# Altium PCB Routed BOARD 1.pcbdoc
Units mil, origin at the board's own origin, x right, y up, seen from the top; angles counter-clockwise.
Board outline 5016 x 3650 mil, 2 copper layers (TopLayer, BottomLayer); 37 components, 98 nets, 554 pads, 116 vias.
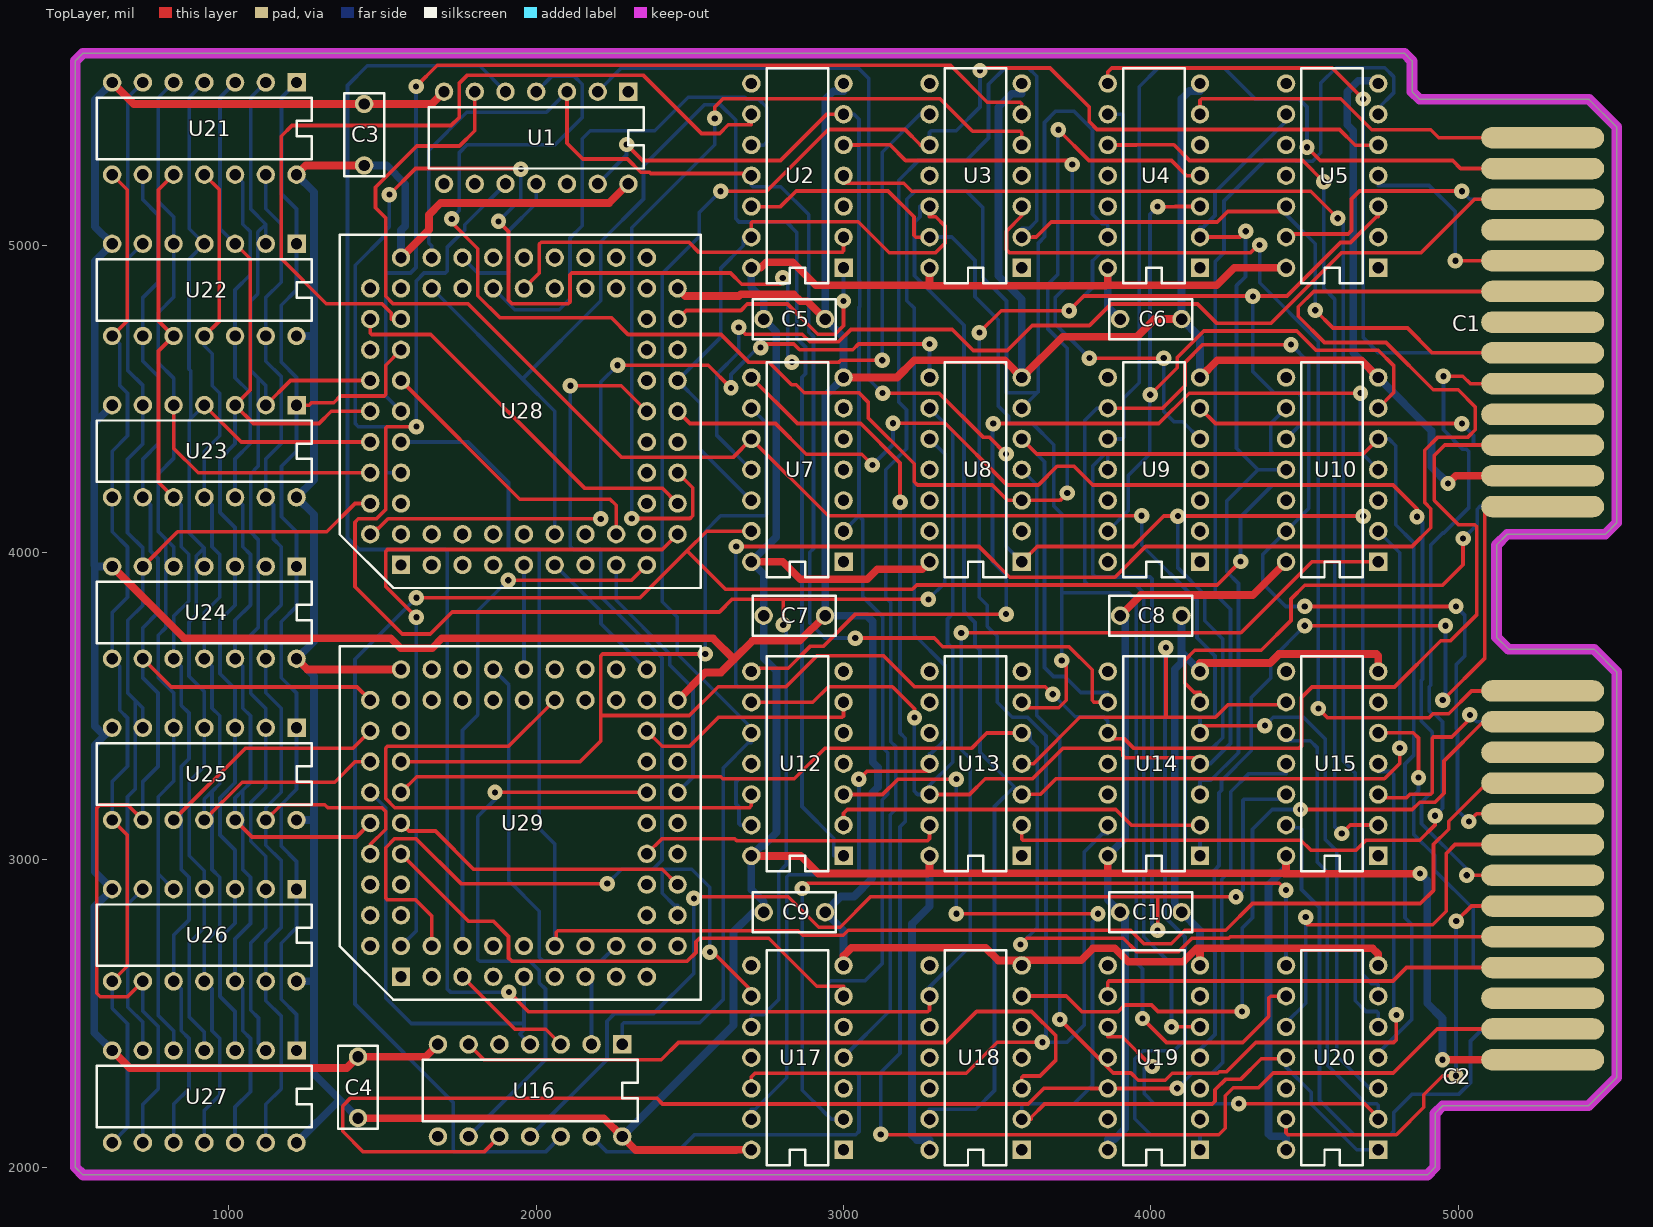
[diagram p0: TopLayer view]
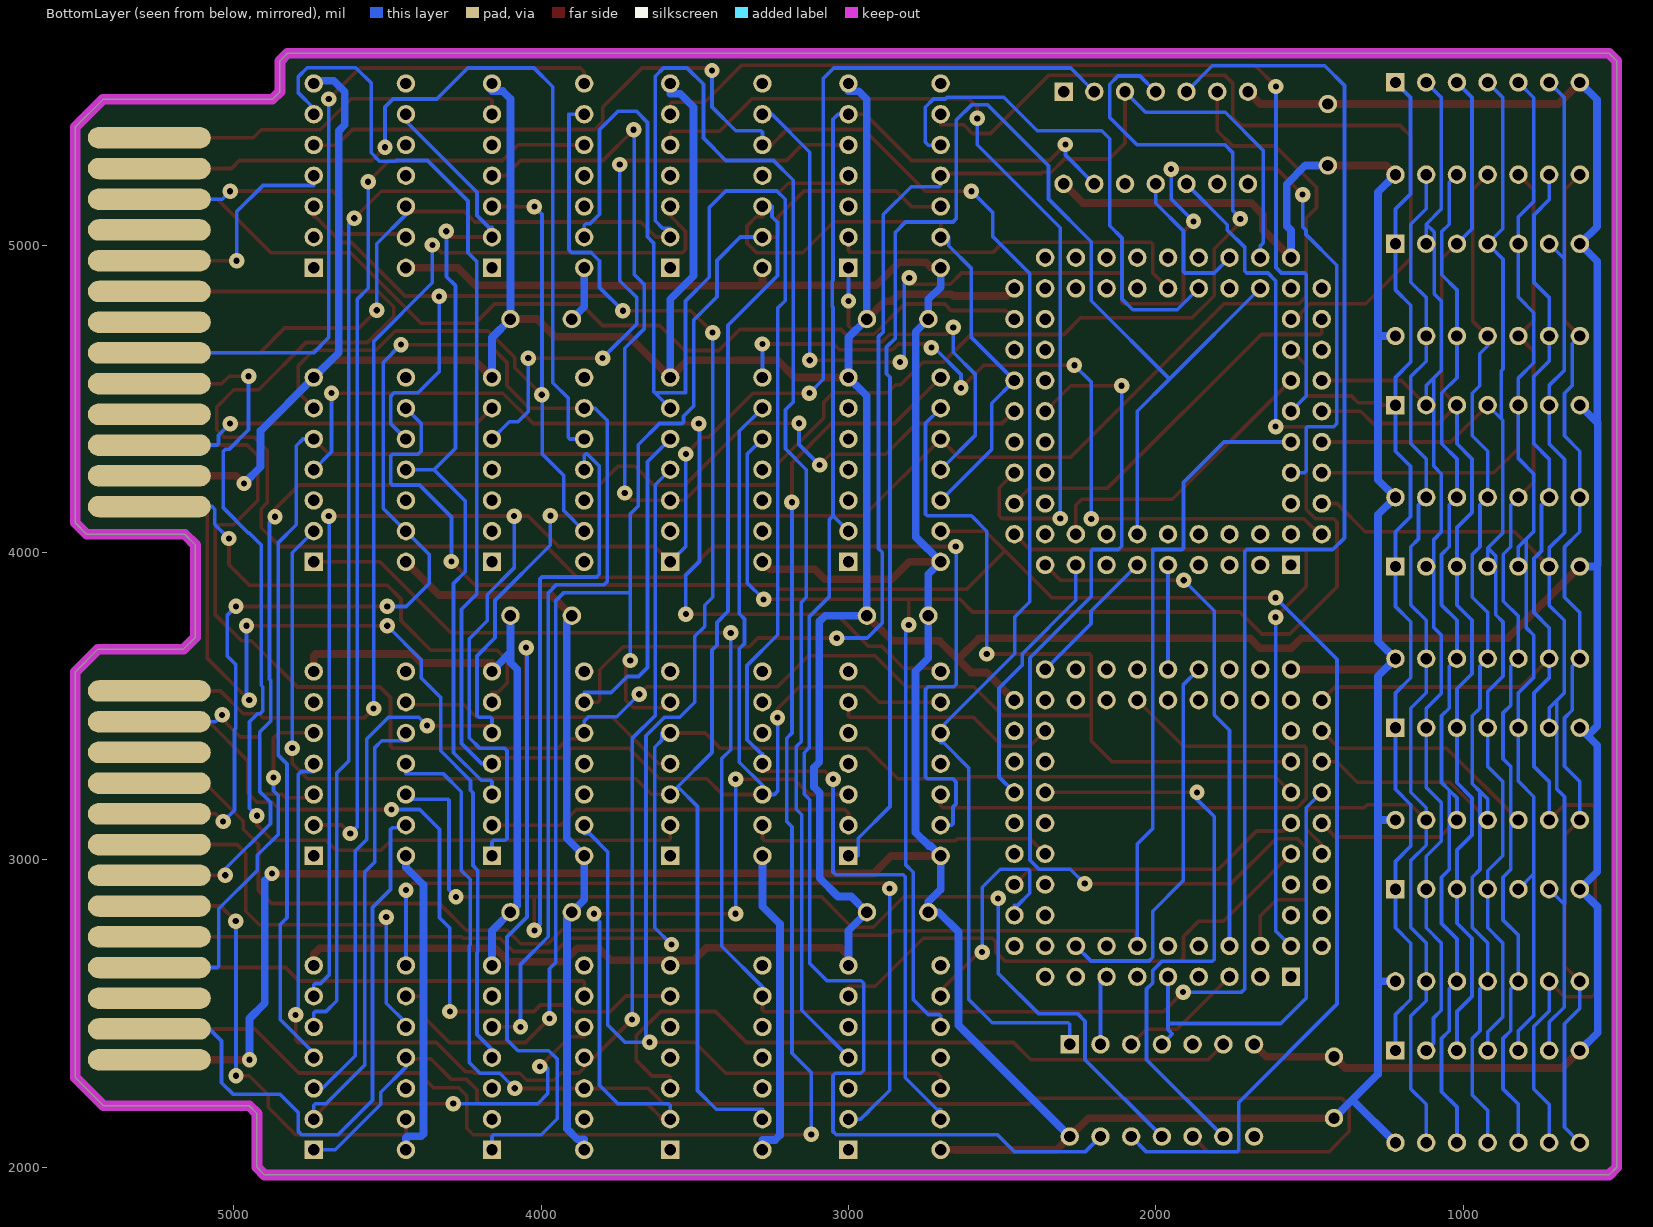
[diagram p1: BottomLayer view, seen from below]

## Layer stack, top to bottom
TopLayer: signal copper 1.4
Dielectric: core 12.6, FR-4, Dk 4.8
BottomLayer: signal copper 1.4

## Board outline
500,2000 525,1975 4900,1975 4925,2000 4925,2175 4950,2200 5424,2200 5516,2292 5516,3612 5442,3686 5164,3686 5125,3725 5125,4025 5160,4060 5479,4060 5516,4097 5516,5385 5426,5475 4875,5475 4850,5500 4850,5600 4825,5625 525,5625 500,5600 500,2000

## Design rules (kind name [scope] priority, off if disabled: settings)
Clearance [All] p1: gap=13
FabricationTestPointUsage TestPointUsage [All] p1: valid=0 allowmultiple=FALSE
FabricationTestpoint Testpoint [All] p1: side=3 testpointundercomponent=TRUE minsize=40 maxsize=100 preferedsize=60 minholesize=20 maxholesize=40 preferedholesize=32 testpointgrid=1 allowsidetop=TRUE allowsidebottom=TRUE usegrid=TRUE gridtolerance=0.01
PlaneClearance [All] p1: clearance=10
PolygonConnect [All] p1: connectstyle=Relief reliefconductorwidth=10 reliefentries=4 polygonreliefangle="90 Angle"
RoutingPriority RoutingPriority_Power [InNetClass('Power')] p1: routingpriority=10
RoutingPriority [All] p2: routingpriority=0
RoutingTopology [InNet('GND')] p1: topology=Vertical
RoutingTopology RoutingTopology_1 [InNet('VCC')] p2: topology=Vertical
RoutingTopology RoutingTopology_2 [All] p3: topology=Shortest
RoutingVias [All] p1: holewidth=20 width=50 viastyle="Through Hole" minholewidth=20 minwidth=50 maxholewidth=20 maxwidth=50
SilkscreenOverComponentPads [All] p1: minsilkscreentomaskgap=10
SolderMaskExpansion [All] p1: expansion=2
Width Width_Power [InNetClass('Power')] p1: maxlimit=25 minlimit=25 preferedwidth=25
Width Width_All [All] p2: maxlimit=12 minlimit=12 preferedwidth=12
22 further rules are at their usual default settings.

## Classes and differential pairs
net class Power: GND VCC

## Components (designator, comment, footprint, x,y, rotation, side; value= is the part's Value field where it differs from the comment)
C1 "CON\26P\ED" CON\26P\ED 5275,4150 r90 top
C2 "CON\26P\ED" CON\26P\ED 5275,2350 r90 top
C3 "CAP" DCAP\SR21 1440,5260 r90 top
C4 "CAP" DCAP\SR21 1420,2160 r90 top
C5 "CAP" DCAP\SR21 2940,4760 r180 top
C6 "CAP" DCAP\SR21 4100,4760 r180 top
C7 "CAP" DCAP\SR21 2940,3795 r180 top
C8 "CAP" DCAP\SR21 4100,3795 r180 top
C9 "CAP" DCAP\SR21 2940,2830 r180 top
C10 "CAP" DCAP\SR21 4100,2830 r180 top
U1 "7404" DIP14 2300,5500 r180 top
U2 "7404" DIP14 3000,4926.67 r90 top
U3 "7404" DIP14 3580,4926.67 r90 top
U4 "7404" DIP14 4160,4926.67 r90 top
U5 "7404" DIP14 4740,4926.67 r90 top
U7 "7404" DIP14 3000,3970 r90 top
U8 "7404" DIP14 3580,3970 r90 top
U9 "7404" DIP14 4160,3970 r90 top
U10 "7404" DIP14 4740,3970 r90 top
U12 "7404" DIP14 3000,3013.33 r90 top
U13 "7404" DIP14 3580,3013.33 r90 top
U14 "7404" DIP14 4160,3013.33 r90 top
U15 "7404" DIP14 4740,3013.33 r90 top
U16 "7404" DIP14 2280,2400 r180 top
U17 "7404" DIP14 3000,2056.67 r90 top
U18 "7404" DIP14 3580,2056.67 r90 top
U19 "7404" DIP14 4160,2056.67 r90 top
U20 "7404" DIP14 4740,2056.67 r90 top
U21 "7404" DIP14 1220,5530 r180 top
U22 "7404" DIP14 1220,5005 r180 top
U23 "7404" DIP14 1220,4480 r180 top
U24 "7404" DIP14 1220,3955 r180 top
U25 "7404" DIP14 1220,3430 r180 top
U26 "7404" DIP14 1220,2905 r180 top
U27 "7404" DIP14 1220,2380 r180 top
U28 "8397" PGA\68P 1560,3960 r0 top
U29 "8397" PGA\68P 1560,2620 r0 top

## Footprints (in the part's own frame and the unit in brackets; to place one, negate y for a bottom-side part, rotate by r counter-clockwise, add the part's x,y. Pads: shape width x height; smd on the part's side, far side on the other; paste and mask are expansions set on the pad)
CON\26P\ED [mil]
  oval 70x400 smd: 1(0,0) 3(100,0) 5(200,0) 7(300,0) 9(400,0) 11(500,0) 13(600,0) 15(700,0) 17(800,0) 19(900,0) 21(1000,0) 23(1100,0) 25(1200,0)
  oval 70x400 smd far side: 2(0,0) 4(100,0) 6(200,0) 8(300,0) 10(400,0) 12(500,0) 14(600,0) 16(700,0) 18(800,0) 20(900,0) 22(1000,0) 24(1100,0) 26(1200,0)
DCAP\SR21 [mil]
  round 60 hole 37: 1(0,0) 2(200,0)
  silkscreen extent -35,-65 235,65
DIP14 [mil]
  rect 60x60 hole 37: 1(0,0)
  round 60 hole 37: 2(100,0) 3(200,0) 4(300,0) 5(400,0) 6(500,0) 7(600,0) 8(600,300) 9(500,300) 10(400,300) 11(300,300) 12(200,300) 13(100,300) 14(0,300)
  silkscreen extent -50,50 650,250
PGA\68P [mil]
  rect 60x60 hole 37: 1(0,0)
  round 60 hole 37: 2(0,100) 3(100,0) 4(100,100) 5(200,0) 6(200,100) 7(300,0) 8(300,100) 9(400,0) 10(400,100) 11(500,0) 12(500,100) 13(600,0) 14(600,100) 15(700,0) 16(700,100) 17(800,0) 18(900,100) 19(800,100) 20(900,200) 21(800,200) 22(900,300) 23(800,300) 24(900,400) 25(800,400) 26(900,500) 27(800,500) 28(900,600) 29(800,600) 30(900,700) 31(800,700) 32(900,800) 33(800,800) 34(900,900) 35(800,1000) 36(800,900) 37(700,1000) 38(700,900) 39(600,1000) 40(600,900) 41(500,1000) 42(500,900) 43(400,1000) 44(400,900) 45(300,1000) 46(300,900) 47(200,1000) 48(200,900) 49(100,1000) 50(100,900) 51(0,1000) 52(-100,900) 53(0,900) 54(-100,800) 55(0,800) 56(-100,700) 57(0,700) 58(-100,600) 59(0,600) 60(-100,500) 61(0,500) 62(-100,400) 63(0,400) 64(-100,300) 65(0,300) 66(-100,200) 67(0,200) 68(-100,100)
  silkscreen extent -200,-75 975,1075

## Via types
v1: diameter 50, hole 20, TopLayer to BottomLayer, 116 vias

## Nets (pads, with @x,y where several pads share a name; then routed paths per layer and width w, separated by ;. In a path a pad name is that pad's centre, name@x,y a point inside that pad or via, vN(x,y) a via of type N, cw(c..) or ccw(c..) an arc to the next point about the centre after c; other vN are vias at no path point)
DY: U21.10 U22.10 U23.10 U24.10 U25.10 U26.10 U27.10 U29.54 | length 4170.8
  TopLayer w12: U25.10 1053,3363 1403,3363 U29.54 ; U23.10 771,4229 771,4656 U22.10 771,4754 771,5181 U21.10
  BottomLayer w12: U27.10 820,2205 870,2255 870,2419 845,2444 845,2580 U26.10 820,2755 870,2805 870,2944 845,2969 845,3105 ; U25.10 845,3105 ; U23.10 845,4155 845,4019 869,3995 869,3842 820,3793 U24.10 845,3630 845,3503 870,3478 870,3329 845,3304 845,3130 845,3105
F: U21.5 U22.5 U23.5 U24.5 U25.5 U26.5 U27.5 U28.64 | length 4320.2
  TopLayer w12: U23.5 820,4340 900,4260 U28.64
  BottomLayer w12: U27.5 820,2444 770,2494 770,2955 ; U26.5 770,2955 ; U24.5 820,4019 794,4045 ; U21.5 770,5480 770,5143 820,5093 U22.5 820,4831 770,4781 770,4618 820,4568 U23.5 820,4306 770,4256 770,4069 794,4045 ; 770,2955 770,3206 820,3256 U25.5 820,3544 770,3594 770,3731 794,3755 794,3955 794,4045
GND: C2.1 C3.1 C4.1 C5.2 C6.2 C7.2 C8.2 C9.2 C10.2 U1.14 U2.14 U3.14 U4.14 U5.14 U7.14 U8.14 U10.14 U12.14 U13.14 U14.14 U15.14 U16.14 U17.14 U18.14 U19.14 U20.14 U21.14 U22.14 U23.14 U24.14 U25.14 U26.14 U27.14 U28.51 U29.51 | length 20563.7
  TopLayer w25: U24.14 1255,3620 U29.51 ; U21.14 1250,5260 C3.1 ; C4.1 2220,2160 U16.14 2324,2056 2651,2056 2651,2056.67 U17.14 ; U28.51 1651,5051 1651,5100 1689,5138 2238,5138 U1.14 ; U12.14 2700,3013 2861,3013 2918,2956 3274,2956 3275,2957 ; U7.14 2802,3970 2859,3913 3077,3913 3110,3946 3256,3946 U8.14 ; U2.14 2731,4926.67 2731,4927 2749,4945 2835,4945 2910,4870 3274,4870 ; U13.14 3280,2962 3275,2957 ; U3.14 3280,4876 3274,4870 ; U14.14 3860,2962 3855,2957 ; U4.14 3860,4876 3854,4870 ; C8.2 3967,3862 4332,3862 U10.14 ; U15.14 4440,2964 4433,2957 ; U5.14 4440,4927 4271,4927 4214,4870 3854,4870 ; v1(4876,2956) 4876,2955 4435,2955 4433,2957 ; v1(4949,2350) C2.1 ; 3274,4870 3275,4869 3853,4869 3854,4870 ; 3275,2957 3855,2957 ; 3855,2957 4433,2957
  BottomLayer w25: U27.14 1360,2220 ; U26.14 1277,2605 ; U25.14 1277,3130 ; U22.14 1277,4705 ; U21.14 1277,5173 1277,4705 ; C4.1 1360,2220 ; C3.1 1513,5260 1574,5199 1574,5063 1560,5049 U28.51 ; U16.14 2642,2462 2642,2766 2706,2830 C9.2 2740,2864 2700,2904 U12.14 2732,3045.33 2738,3045.33 2738,3046 2782,3090 2782,3614 2740,3656 C7.2 2740,3930 U7.14 2781,4051 2781,4719 C5.2 2740,4824 2700,4864 U2.14 ; U18.14 3280,2089 3238,2089 3223,2104 3223,2792 3280,2849 U13.14 ; U19.14 3860,2091 3882,2091 3916,2125 3916,2814 C10.2 3860,2870 U14.14 3917,3070.33 3917,3778 C8.2 ; U4.14 3860,4800 C6.2 ; U20.14 4440,2096 4435,2101 4390,2101 4383,2108 4383,2919 4440,2976 U15.14 ; v1(4876,2956) 4899,2933 4899,2534 4949,2484 v1(4949,2350) ; 1277,2605 1277,3130 ; 1277,2605 1277,2303 1360,2220 ; 1277,3130 1277,3598 U24.14 1277,3712 1277,4123 U23.14 1277,4237 1277,4705
NetC1_1: C1.1 U19.4 | length 3127
  TopLayer w12: v1(4501,3762) v1(4959,3762) ; v1(4950,3520) 5087,3657 5087,4149 5088,4150 C1.1
  BottomLayer w12: U19.4 4160,2383 4209,2432 4209,2698 4206,2701 4206,2966 4222,2982 4222,3219 4230,3227 4230,3258 4327,3355 4327,3529 4390,3592 4390,3651 v1(4501,3762) ; v1(4950,3520) 4959,3529 v1(4959,3762)
NetC1_2: C1.2 U14.6 | length 1659.5
  TopLayer w12: U14.6 4160,3545 4141,3545 4110,3576 4110,3649 4143,3682 4359,3682 4456,3779 4456,3849 4501,3894 4949,3894 5016,3961 v1(5016,4046)
  BottomLayer w12: v1(5016,4046) 5062,4092 5062,4141 5071,4150 C1.2
NetC1_5: C1.5 U7.9 U14.10 U29.57 | length 6620.2
  TopLayer w12: U29.57 2143,3320 2210,3387 2210,3470 ; v1(2550,3670) 2216,3670 2210,3664 2210,3470 ; v1(3681,3539) 3656,3564 3231,3564 3131,3664 2913,3664 2813,3564 2592,3564 2498,3470 2210,3470 ; U14.10 3860,3394 3914,3394 3945,3363 4482,3363 4490,3371 4490,3529 4524,3563 4793,3563 4943,3713 4975,3713 5061,3799 5061,4084 5054,4091 5001,4091 4922,4170 4922,4316 4956,4350 C1.5
  BottomLayer w12: v1(2550,3670) 2550,4070 2600,4120 2744,4120 2749,4125 2749,4421 U7.9 ; v1(3681,3539) 3754,3466 3846,3466 3860,3452 U14.10
NetC1_6: C1.6 U9.6 | length 1180.5
  TopLayer w12: U9.6 4210,4420 v1(5012,4420)
  BottomLayer w12: v1(5012,4420) 5050,4382 5050,4355 5055,4350 C1.6
NetC1_9: C1.9 U13.2 | length 3360.4
  TopLayer w12: U13.2 3580,3068 3584,3064 4488,3064 4520,3032 4668,3032 4700,3064 4875,3064 4925,3114 v1(4925,3144) ; v1(4952,4574) 5015,4574 5039,4550 C1.9
  BottomLayer w12: v1(4925,3144) 4949,3168 4949,3450 4923,3476 4915,3476 4906,3485 4906,3564 4911,3569 4911,4025 4950,4064 4953,4064 5034,4145 5034,4330 5028,4336 5016,4336 4952,4400 v1(4952,4574)
NetC1_11: C1.11 U3.2 U5.12 U17.4 | length 6336.1
  TopLayer w12: U3.2 3616,5026.67 3616,5027 3627,5027 3676,5076 4216,5076 4250,5110 4440,5110 U5.12 ; v1(4535,4789) 4593,4731 4835,4731 4916,4650 C1.11
  BottomLayer w12: U17.4 3000,2359 3152,2511 3152,3147 3170,3165 3170,3369 3154,3385 3154,3838 3137,3855 3137,4270 3205,4338 3205,4465 3180,4490 3180,5212 3244,5276 3399,5276 3472,5349 3472,5524 3525,5577 3602,5577 3629,5550 3629,5080 3605,5056 3580,5056 U3.2 ; U5.12 4440,5100 4535,5005 v1(4535,4789)
NetC1_12: C1.12 U4.8 | length 2296.3
  TopLayer w12: U4.8 3860,5564 3873,5577 4590,5577 v1(4691,5476)
  BottomLayer w12: v1(4691,5476) 4691,4700 4741,4650 C1.12
NetC1_15: C1.15 U12.13 | length 5568.4
  TopLayer w12: v1(2651,4020) 3441,4020 3541,3920 3883,3920 3983,4020 4850,4020 4911,4081 4911,4143 4891,4163 4891,4333 4934,4376 5032,4376 5056,4400 5056,4474 5000,4530 4919,4530 4765,4684 4565,4684 4480,4769 4480,4800 4530,4850 C1.15
  BottomLayer w12: v1(2651,4020) 2649,4018 2649,3572 2657,3564 2740,3564 2749,3555 2749,3270 2743,3264 2660,3264 2650,3254 2650,3182 2660,3172 2660,3118.33 2665,3113.33 U12.13
NetC1_17: C1.17 U5.4 | length 761.3
  TopLayer w12: v1(4991,4950) C1.17
  BottomLayer w12: U5.4 4740,5195 4905,5195 4991,5109 v1(4991,4950)
NetC1_21: C1.21 U7.11 | length 3475.8
  TopLayer w12: v1(2659,4733) 2681,4711 2866,4711 2891,4686 2984,4686 3024,4726 3354,4726 3422,4658 3533,4658 3614,4739 3800,4739 3870,4809 4152,4809 4215,4746 4390,4746 4620,4976 4879,4976 5053,5150 C1.21
  BottomLayer w12: v1(2659,4733) 2659,4652 2587,4580 2587,4383 U7.11
NetC1_22: C1.22 U5.13 | length 974.8
  TopLayer w12: U5.13 4440,5037 4642,5037 4653,5048 4653,5151 4679,5177 5011,5177 v1(5012,5176)
  BottomLayer w12: v1(5012,5176) 5038,5150 C1.22
NetC1_23: C1.23 U9.10 | length 2766.2
  TopLayer w12: v1(4508,5319) 4551,5276 4982,5276 5008,5250 C1.23
  BottomLayer w12: U9.10 3907,4370 3912,4375 3912,4503 3962,4553 3962,5516 4023,5577 4239,5577 4340,5476 4482,5476 4508,5450 v1(4508,5319)
NetC1_25: C1.25 U4.6 | length 1214.4
  TopLayer w12: U4.6 4160,5471 4166,5477 4618,5477 4719,5376 4911,5376 4937,5350 C1.25
NetC2_3: C2.3 U7.8 | length 5183.3
  TopLayer w12: U7.8 2850,4420 3056,4420 3184,4292 v1(3184,4164) ; v1(3121,2107) 3122,2106 4221,2106 4242,2127 4242,2233 4268,2259 4350,2259 4398,2307 4789,2307 4932,2450 C2.3
  BottomLayer w12: v1(3121,2107) 3121,2308 3184,2371 3184,3108 3201,3125 3201,3396 3184,3413 v1(3184,4164)
NetC2_7: C2.7 U19.9 | length 1480.2
  TopLayer w12: U19.9 3860,2602 3864,2606 4788,2606 4832,2650 C2.7
NetC2_9: C2.9 U13.5 U29.59 | length 4598.9
  TopLayer w12: U29.59 1611,3271 2600,3271 2607,3264 2840,3264 2939,3363 3416,3363 3448,3395 3448,3395.33 3466,3413.33 U13.5 ; v1(3576,2725) 3596,2745 3910,2745 3953,2702 4091,2702 4134,2745 4253,2745 4258,2750 C2.9
  BottomLayer w12: v1(3576,2725) 3630,2779 3630,3367 3608,3389 3608,3413.33 U13.5
NetC2_13: C2.13 U28.26 | length 4279.8
  TopLayer w12: U28.26 2500,4420 2779,4420 2879,4320 3059,4320 v1(3094,4285) ; v1(3161,4421) 3331,4421 3532,4220 3634,4220 3695,4281 3750,4281 3811,4220 4788,4220 4866,4142 v1(4866,4117) ; v1(5028,2950) C2.13
  BottomLayer w12: v1(3094,4285) 3161,4352 v1(3161,4421) ; v1(4866,4117) 4884,4099 4884,3588 4880,3584 4880,3452 4916,3416 4916,3223 4881,3188 4881,3118 5028,2971 v1(5028,2950)
NetC2_17: C2.17 U9.9 U10.13 U19.5 | length 5605.1
  TopLayer w12: U9.9 4038,4470 4111,4543 4111,4619 4169,4677 v1(4456,4677) ; v1(4067,2457) 4160,2457 U19.5 ; v1(4501,3825) v1(4993,3825) ; v1(5035,3125) 5060,3150 C2.17
  BottomLayer w12: U9.9 3825,4470 3785,4430 3785,3906 3795,3896 3950,3896 3977,3869 3977,2750 4067,2660 v1(4067,2457) ; v1(4456,4677) 4514,4619 4514,4144 U10.13 4364,3994 4364,3900 4439,3825 v1(4501,3825) ; v1(4993,3825) 5021,3797 5021,3663 4994,3636 4994,3428 4998,3424 4998,3162 v1(5035,3125)
NetC2_19: C2.19 U28.63 U29.12 | length 5642.7
  TopLayer w12: U29.12 2065,2720 2065,2765 2070,2770 2852,2770 2867,2755 2999,2755 3015,2771 3934,2771 3978,2727 4066,2727 4110,2771 4244,2771 4331,2858 4877,2858 4920,2901 4920,3051 4969,3100 4969,3126 5093,3250 C2.19
  BottomLayer w12: U28.63 1778,4360 1910,4228 1910,4015 1915,4010 2009,4010 2010,4009 2010,3102 2060,3052 U29.12
NetC2_23: C2.23 U18.6 | length 2513.8
  TopLayer w12: U18.6 3580,2557 3725,2557 3776,2506 3893,2506 3915,2528 4002,2528 4023,2507 v1(4297,2507) ; v1(4487,3164) 4851,3164 4875,3188 4925,3188 4954,3217 4954,3322 5082,3450 C2.23
  BottomLayer w12: v1(4297,2507) 4297,2778 4331,2812 4331,3100 4395,3164 v1(4487,3164)
NetC2_25: C2.25 U3.3 | length 3365.5
  TopLayer w12: U3.3 3580,5096 3530,5046 3530,4986 3540,4976 4324,4976 4349,5001 v1(4354,5001) ; v1(4545,3493) 4575,3463 4905,3463 4918,3476 4969,3476 5043,3550 C2.25
  BottomLayer w12: v1(4354,5001) 4354,4878 4545,4687 v1(4545,3493)
NetU1_2: U1.2 U8.1 U14.1 U20.6 | length 6900
  TopLayer w12: v1(3127,4519) 3311,4519 3454,4376 3474,4376 v1(3529,4321) ; U8.1 3630,4020 3943,4020 4042,4119 v1(4088,4119) v1(4691,4119)
  BottomLayer w12: U1.2 2277,5577 3048,5577 3082,5543 3082,4564 v1(3127,4519) ; v1(3529,4321) 3529,4021 U8.1 ; v1(4088,4119) 4088,3950 4175,3863 4175,3778 4234,3719 4234,3398 4199,3363 4119,3363 4111,3355 4111,3070 4117,3064 4155,3064 4160,3059 U14.1 ; v1(4691,4119) 4690,4119 4690,2626 4718,2598 4735,2598 4740,2593 U20.6
NetU1_5: U1.5 U10.1 U18.9 | length 8162.5
  TopLayer w12: v1(1911,2570) 1975,2506 3274,2506 3280,2512 U18.9 ; v1(3383,3739) 4293,3739 4524,3970 U10.1
  BottomLayer w12: U1.5 1816,5584 1450,5584 1386,5520 1386,4048 1424,4010 1704,4010 1710,4004 1710,2581 1721,2570 v1(1911,2570) ; U18.9 3280,2587 3412,2719 3412,3330 3383,3359 v1(3383,3739)
NetU1_6: U1.6 U7.10 U14.5 U20.3 | length 6246.1
  TopLayer w12: U1.6 1800,5373 1750,5323 1611,5323 1477,5189 1477,5122 1510,5089 1510,4834 1534,4810 1778,4810 2278,4310 2640,4310 U7.10 2950,4120 v1(3970,4120) ; U14.5 4160,3437 v1(4371,3437)
  BottomLayer w12: v1(3970,4120) 3970,4024 4150,3844 4150,3723 4209,3664 4209,3470 4203,3464 4165,3464 4160,3459 U14.5 ; v1(4371,3437) 4398,3464 4497,3464 4568,3393 4568,3066 4605,3029 4605,2363 4712,2256 4740,2256 U20.3
NetU1_10: U1.10 U8.10 U17.10 | length 5649.2
  TopLayer w12: v1(1610,4410) 1514,4410 1510,4406 1510,4140 1480,4110 1421,4110 1410,4099 1410,3889 1564,3735 1655,3735 1727,3807 2596,3807 2637,3848 2804,3848 ; v1(2804,3765) 2804,3848 ; v1(3276,3848) 2804,3848
  BottomLayer w12: v1(1610,4410) 1610,4885 1635,4910 1704,4910 1710,4916 1710,4993 1767,5050 1767,5067 U1.10 ; U17.10 2700,2492 2705,2497 2740,2497 2789,2546 2789,2960 2814,2985 2814,3755 v1(2804,3765) ; v1(3276,3848) 3329,3901 3329,4321 U8.10
NetU1_11: U1.11 U28.47 | length 495.6
  BottomLayer w12: U28.47 1810,4910 1906,4910 1910,4914 1910,5047 2000,5137 U1.11
NetU1_13: U1.13 U2.6 U7.2 U16.13 | length 5574.9
  TopLayer w12: v1(2294,5328) 2346,5276 2795,5276 2946,5427 3000,5427 U2.6
  BottomLayer w12: U16.13 2230,2050 2459,2050 2515,2106 3040,2106 3050,2116 3050,2299 3043,2306 2960,2306 2950,2316 2950,2599 2958,2607 3070,2607 3126,2663 3126,3196 3144,3214 3144,3349 3128,3365 3128,3791 3062,3857 3062,4108 3050,4120 ; U1.13 2294,5294 v1(2294,5328) ; U7.2 3050,4120 ; U2.6 3000,5427 3033,5427 3050,5410 3050,4887 3053,4884 3053,4801 3050,4798 3050,4120
NetU2_1: U2.1 U28.32 | length 800.7
  TopLayer w12: U28.32 2488,4788 2666,4788 2687,4809 2818,4809 2916,4711 2973,4711 3000,4738 v1(3000,4819)
  BottomLayer w12: v1(3000,4819) U2.1
NetU2_2: U2.2 U28.44 | length 1217.6
  TopLayer w12: U28.44 2010,4910 2010,5004 2016,5010 2497,5010 2530,4977 2995,4977 3000,4982 U2.2
NetU2_4: U2.4 U20.5 | length 4386.4
  TopLayer w12: U2.4 3000,5202 3196,5202 3222,5176 4520,5176 v1(4608,5088)
  BottomLayer w12: v1(4608,5088) 4626,5070 4626,3322 4665,3283 4665,2542 4700,2507 4735,2507 4740,2502 U20.5
NetU2_5: U2.5 U9.5 | length 2040.5
  TopLayer w12: U2.5 3050,5326.67 3050,5327 3151,5327 3202,5276 3731,5276 v1(3744,5263) ; v1(3800,4633) v1(4042,4633)
  BottomLayer w12: v1(3744,5263) 3744,4885 3689,4830 3689,4744 v1(3800,4633) ; v1(4042,4633) 4042,4459 4075,4426 4104,4426 U9.5
NetU2_9: U2.9 U28.55 | length 2682.9
  TopLayer w12: U28.55 1528,4760 1528,4780 1498,4810 1317,4810 1170,4957 1170,5355 1205,5390 1723,5390 1750,5417 1750,5528 1775,5553 2349,5553 2538,5364 2597,5364 2625,5392 2700,5392 U2.9
NetU2_10: U2.10 U28.46 | length 1669.5
  BottomLayer w12: U28.46 1930,4790 2075,4790 2110,4825 2110,5024 2150,5064 2150,5347 2176,5373 2386,5373 2495,5482 2679,5482 2685,5476 2723,5476 2750,5449 2750,5336 2740,5326 2700,5326 U2.10
NetU2_11: U1.3 U2.11 U8.5 U10.5 U14.9 U20.4 U28.49 | length 8824.7
  TopLayer w12: U1.3 2100,5332 2151,5281 2297,5281 2340,5238 2369,5238 2373,5234 2700,5234 U2.11 ; v1(3038,3722) 3295,3722 3323,3694 3734,3694 3809,3619 3809,3519.33 3815,3513.33 U14.9 ; U8.5 3629,4321 4691,4321 U10.5
  BottomLayer w12: U28.49 1660,4998 1650,5008 1650,5309 1774,5433 2033,5433 U1.3 ; U2.11 2700,5196 2705,5191 2796,5191 2887,5100 2887,4718 2902,4703 2902,4013 2890,4001 2890,3771 2939,3722 v1(3038,3722) ; U8.5 3654,4296 3654,3626 3683,3597 3720,3597 3772,3545 3860,3545 U14.9 ; U20.4 4740,2372 4849,2481 4849,2790 4827,2812 4827,3312 4855,3340 4855,4033 4797,4091 4797,4348 4775,4370 U10.5
NetU2_12: U2.12 U3.13 U13.6 U20.9 | length 4867.8
  TopLayer w12: U2.12 2700,5126 2795,5126 2846,5177 3145,5177 3229,5093 3229,5032.67 3235,5026.67 U3.13 ; U13.6 3580,3495 3700,3495 3725,3520 3725,3634 v1(3710,3649) ; v1(3973,2484) 4051,2406 4299,2406 4384,2491 4384,2550.67 4390,2556.67 U20.9
  BottomLayer w12: U3.13 3280,5027 3352,5027 3428,4951 3428,4833 3503,4758 3503,4478 3537,4444 3537,4425 3542,4420 3615,4420 3684,4351 3684,4152 3710,4126 3710,3870 ; v1(3710,3649) 3710,3870 ; v1(3973,2484) 3973,2646 3952,2667 3952,3844 3926,3870 3710,3870
NetU2_13: U2.13 U3.12 U7.12 U10.2 U13.3 U18.13 U28.28 | length 7393.3
  TopLayer w12: U2.13 2700,5074 2703,5077 3048,5077 3149,4976 3299,4976 3330,5007 3330,5063 3300,5093 3280,5093 U3.12 ; U13.3 3641,3213.33 3641,3214 3691,3264 4760,3264 4810,3314 v1(4810,3364)
  BottomLayer w12: U7.12 2534,4336 2534,4486 U28.28 2600,4700 2600,4925 2674,4999 2674,5026.67 U2.13 ; U18.13 3280,2189 3430,2189 3491,2250 3491,3174 3555.17,3238.17 3555.5,3238.5 ; U3.12 3249,5126.67 3249,5093 3231,5075 3231,4901 3392,4740 3392,3809 3428,3773 3428,3699 3444,3683 3444,3350 3555.5,3238.5 ; U13.3 3580,3214 3555.5,3238.5 ; U10.2 4810,4000 v1(4810,3364)
NetU3_5: U3.5 U28.22 | length 2908.4
  TopLayer w12: v1(2311,4111) 2500,4111 2509,4120 2509,4211 U28.22 ; v1(2581,5413) 2581,5450 2608,5477 3314,5477 3420,5371 3575,5371 3580,5366 U3.5
  BottomLayer w12: v1(2311,4111) 2311,5057 2581,5327 v1(2581,5413)
NetU3_6: U3.6 U28.61 | length 3248.3
  TopLayer w12: v1(1609,5517) 1678,5586 3348,5586 3468,5466 3575,5466 3580,5461 U3.6
  BottomLayer w12: U28.61 1510,4510 1510,4904 1516,4910 1591,4910 1609,4928 v1(1609,5517)
NetU3_9: U3.9 U28.65 | length 4510.6
  TopLayer w12: v1(1522,5165) 1607,5250 1948,5250 v1(1950,5248) ; v1(1877,5078) 1910,5045 1910,4821 1921,4810 2104,4810 2110,4816 2110,4904 2116,4910 2632,4910 2669,4873 2795,4873 2802,4880 v1(2802,4894) ; v1(2832,4620) 2985,4620 2991,4626 v1(3126,4626)
  BottomLayer w12: v1(1522,5165) 1522,5060 1511,5049 1511,5035 1411,4935 1411,4420 1421,4410 1506,4410 1510,4406 1510,4266 1516,4260 U28.65 ; v1(1877,5078) 1950,5151 v1(1950,5248) ; v1(2802,4894) 2818,4878 2818,4641 2832,4627 v1(2832,4620) ; v1(3126,4626) 3126,5303 3250,5427 3280,5427 U3.9
NetU3_10: U3.10 U5.5 U12.10 U16.1 | length 5901.6
  TopLayer w12: v1(2600,5176) 2749,5176 2950,5377 3200,5377 3250,5327 3250,5326.67 U3.10 ; v1(3444,5569) 3452,5577 3672,5577 3800,5449 3800,5402 3825,5377 4614,5377 4665,5326 4740,5326 U5.5
  BottomLayer w12: U16.1 2280,2465 2285,2470 2532,2470 2609,2547 2609,3300 2690,3381 ; v1(2600,5176) 2530,5106 2530,5028 2410,4908 2410,3840 2459,3791 2459,3671 2690,3440 2690,3413.33 2690,3381 ; U12.10 2700,3381 2690,3381 ; U3.10 3280,5368 3285,5373 3367,5373 3444,5450 v1(3444,5569)
NetU4_2: U4.2 U5.9 U10.11 U14.3 | length 2772.1
  TopLayer w12: U4.2 4178,5026.67 4178,5027 4290,5027 v1(4309,5046)
  BottomLayer w12: U14.3 4160,3254 4165,3259 4195,3259 4285,3349 4285,3900 4247,3938 4247,4168 4349,4270 ; U4.2 4160,5058 4170,5058 4209,5097 4209,5173 4440,5404 U5.9 ; v1(4309,5046) 4308,5046 4308,4898 4279,4869 4279,4340 4349,4270 ; U10.11 4349,4270
NetU4_3: U4.3 U9.13 U10.6 | length 2952.9
  TopLayer w12: v1(3998,4514) 4086,4602 4086,4635 4172,4721 4475,4721 4537,4659 4740,4659 4790,4609 4790,4520 U10.6 ; v1(4022,5126) 4079,5126 4079,5126.67 U4.3
  BottomLayer w12: U9.13 3926,4136 3926,4250 3996,4320 3996,4514 3996,5100 3998,5102 ; v1(3998,4514) 3998,5102 ; v1(4022,5126) 3998,5102
NetU4_4: U1.4 U4.4 U8.3 | length 5264.7
  TopLayer w12: v1(1725,5086) 1725,5074 1810,4989 1810,4836 1882,4764 2245,4764 2299,4710 2601,4710 2691,4620 2757,4620 2831,4546 2846,4546 2872,4520 3050,4520 3080,4490 3080,4439 3230,4289 3230,4231 3241,4220 3484,4220 3534,4170 U8.3 3704,4170 v1(3728,4194) ; v1(3699,5376) 3799,5276 4067,5276 4117,5226 4160,5226 U4.4
  BottomLayer w12: v1(1725,5086) 1725,5089 1750,5114 1750,5302 1775,5327 2061,5327 2150,5416 2150,5524 2123,5551 2051,5551 U1.4 ; v1(3699,5376) 3697,5376 3697,4905 3664,4872 3664,4729 3728,4665 v1(3728,4194)
NetU4_9: U4.9 U5.3 U10.10 U14.13 U17.12 | length 8342.3
  TopLayer w12: U17.12 2700,2294 2712,2306 3399,2306 3500,2407 v1(3647,2407) ; v1(3442,4716) 3513,4787 v1(3734,4787) 3781,4834 ; v1(4332,4834) 3781,4834 ; U5.3 4740,5094 4735,5094 4650,5009 4617,5009 4443,4835 4332,4835 3782,4835 3781,4834
  BottomLayer w12: v1(3442,4716) 3442,3855 3468,3829 3468,3760 3500,3728 3500,3513 3549,3464 3599,3464 3659,3404 3659,2419 v1(3647,2407) 3727,2407 3783,2463 3783,3026 3843,3086 3860,3086 U14.13 ; v1(3734,4787) 3810,4863 ; U4.9 3905,5426.67 3905,5427 3909,5427 ; v1(4332,4834) 4332,4589 4401,4520 4479,4520 4489,4510 4489,4419 U10.10 ; 3810,4863 3810,4949 3811,4950 ; 3810,4863 3811,4864 3811,4950 ; 3811,4950 3837,4976 ; 3837,4976 3900,4976 3901,4977 ; 3837,4976 3838,4977 3901,4977 ; 3901,4977 3909,4985 ; 3909,4985 3909,5427 ; 3909,4985 3910,4986 3910,5426 3909,5427
NetU4_10: U4.10 U15.2 | length 3029.3
  TopLayer w12: U4.10 3952,5326.67 3952,5327 4075,5327 4126,5276 4494,5276 v1(4563,5207) ; v1(4621,3086) 4649,3114 4740,3114 U15.2
  BottomLayer w12: v1(4563,5207) 4563,4860 4598,4825 4598,3109 v1(4621,3086)
NetU4_13: U4.13 U8.6 U13.11 U17.13 | length 6114.1
  TopLayer w12: v1(3050,3263) 3076,3289 3280,3289 U13.11
  BottomLayer w12: U17.13 2700,2189 2713,2189 2815,2291 2815,2945 2822,2952 3041,2952 3050,2961 v1(3050,3263) ; U13.11 3280,3346 3285,3346 3330,3391 3330,3633 3230,3733 3230,4796 3206,4820 3206,5150 3233,5177 3399,5177 3453,5123 3453,4896 3530,4819 3530,4520 3630,4520 ; U8.6 3630,4520 ; U4.13 3860,5065 3855,5070 3841,5070 3810,5101 3810,5376 3750,5436 3690,5436 3654,5400 3654,5028 3634,5008 3634,4524 3630,4520
NetU5_6: U5.6 U8.9 U12.9 U13.12 U14.4 | length 6168.2
  TopLayer w12: U12.9 2700,3513 2900,3513 2951,3564 3159,3564 3231,3492 v1(3231,3463) ; U13.12 3280,3213 3410,3213 3461,3264 3615,3264 3715,3364 3900,3364 3909,3355 3909,3339 3915,3333 4160,3333 U14.4
  BottomLayer w12: v1(3231,3463) 3230,3462 3230,3224 3241,3213 3280,3213 U13.12 3280,3243 3355,3318 3355,3687 3338,3704 3338,3784 3355,3801 3355,4395 U8.9 ; U14.4 4194,3313.33 4194,3314 4259,3379 4259,3816 4210,3865 4210,4948 4238,4976 4238,5144 4370,5276 4471,5276 4473,5274 4526,5274 4553,5301 4553,5528 4603,5578 4761,5578 4790,5549 4790,5496 4740,5446 U5.6
NetU7_13: U7.13 U10.9 U16.12 | length 6198
  TopLayer w12: v1(1610,3853) 2338,3853 2491,4006 ; U7.13 2555,4070 2491,4006 ; v1(4292,3971) 4216,3895 3238,3895 3224,3881 2616,3881 2491,4006
  BottomLayer w12: v1(1610,3853) 1410,3653 1410,2531 1730,2211 1730,2056 1736,2050 2030,2050 U16.12 ; v1(4292,3971) 4292,4116 4396,4220 4484,4220 4489,4225 4489,4315 4484,4320 4401,4320 4390,4331 4390,4420 U10.9
NetU8_4: U8.4 U15.4 U19.11 | length 4050.5
  TopLayer w12: v1(3704,2481) 3844.17,2340.83 3860,2325 ; U19.11 3860,2325 ; v1(4799,2496) 4799,2415 4790,2406 4341,2406 4246,2311 4223,2311 4218,2306 4070,2306 4047,2283 3959,2283 3935,2307 3878,2307 3860,2325
  BottomLayer w12: U8.4 3629,4221 3629,3470 3704,3395 v1(3704,2481) ; U15.4 4740,3288 4781,3288 4790,3279 4790,2505 v1(4799,2496)
NetU8_8: U8.8 U28.68 | length 2548.9
  TopLayer w12: U28.68 1479,4079 1487,4079 1518,4110 v1(2210,4110) ; v1(2265,4610) 2560,4610 v1(2634,4536) ; v1(2730,4667) 2742,4679 2838,4679 2857,4660 3030,4660 3049,4679 v1(3280,4679)
  BottomLayer w12: v1(2210,4110) 2210,4555 v1(2265,4610) ; v1(2634,4536) 2634,4580 2721,4667 v1(2730,4667) ; U8.8 v1(3280,4679)
NetU9_11: U9.11 U15.12 U16.11 | length 5323.1
  TopLayer w12: v1(2513,2875) 2518,2880 2820,2880 2919,2781 2989,2781 3088,2880 4022,2880 ; v1(4022,2771) 4022,2880 ; v1(4277,2880) 4022,2880
  BottomLayer w12: U16.11 2230,2350 2230,2475 2255,2500 2382,2500 2513,2631 v1(2513,2875) ; U9.11 3860,4316 3855,4321 3850,4321 3811,4282 3811,3930 3820,3921 3997,3921 4004,3914 4004,2789 v1(4022,2771) ; v1(4277,2880) 4300,2903 4300,3194 4304,3198 4440,3198 U15.12
NetU10_4: U10.4 U12.8 | length 3102.7
  TopLayer w12: U12.8 2679,3613.33 2679,3624 2700,3624 2820,3624 2891,3695 2934,3695 3039,3800 v1(3529,3800) ; v1(3487,4420) 4026,4420 4125,4519 v1(4682,4519)
  BottomLayer w12: v1(3487,4420) 3485,4418 3485,3971 3529,3927 v1(3529,3800) ; v1(4682,4519) 4682,4328 U10.4
NetU12_1: U12.1 U28.12 U28.50 | length 4883.3
  BottomLayer w12: U28.50 1955,4565 ; U28.12 2060,4460 1955,4565 ; U12.1 2968,3013.33 2968,3071 2865,3174 2865,4571 2876,4582 2876,4669 2848,4697 2848,5042 2814,5076 2660,5076 2649,5087 2649,5408 2600,5457 2547,5457 2349,5259 2349,5151 2210,5012 2210,4820 1955,4565
NetU12_2: U12.2 U14.2 | length 1225.1
  TopLayer w12: U12.2 3000,3152 3012,3164 3886,3164 3937,3113 4160,3113 U14.2
NetU12_3: U12.3 U18.2 U20.1 U20.11 | length 3590.4
  TopLayer w12: U12.3 3000,3213 3127,3213 3177,3263 v1(3367,3263) ; v1(3367,2825) v1(3828,2825) ; U18.2 3611,2156.67 3611,2163 3654,2206 4200,2206 4209,2215 4209,2252 4243,2286 4292,2286 4359,2353 4440,2353 U20.11
  BottomLayer w12: v1(3367,2825) v1(3367,3263) ; U18.2 3580,2202 3585,2207 3750,2207 3810,2267 3810,2799 3828,2817 v1(3828,2825) ; U20.11 4440,2326 4522,2244 4522,2205 4670,2057 4670,2056.67 U20.1
NetU12_6: U12.6 U29.33 | length 746.6
  TopLayer w12: U29.33 2410,3370 2499,3370 2593,3464 2996,3464 3000,3468 U12.6
NetU12_12: U12.12 U29.42 | length 2020.9
  TopLayer w12: U29.42 1910,3370 1516,3370 1510,3364 1510,3200 1540,3170 2694,3170 2700,3176 U12.12
NetU13_4: U13.4 U15.9 U19.1 | length 3144.2
  TopLayer w12: U13.4 3612,3313.33 3612,3313 3618,3313 3769,3464 4049,3464 ; v1(4049,3691) 4049,3464 ; U15.9 4440,3505 4251,3505 4210,3464 4049,3464
  BottomLayer w12: v1(4049,3691) 4046,3691 4046,2814 4111,2749 4111,2415 4075,2379 3975,2379 3948,2352 3948,2158 4000,2106 4155,2106 4160,2101 U19.1
NetU13_13: U13.13 U29.25 | length 989.6
  TopLayer w12: U29.25 2409,3069 2646,3069 2652,3063 3274,3063 3280,3069 U13.13
NetU15_3: C2.24 U15.3 | length 778.6
  TopLayer w12: U15.3 4740,3202 4831,3202 4843,3214 4911,3214 4916,3219 4916,3396 4920,3400 4979,3400 5038,3459 v1(5038,3472)
  BottomLayer w12: v1(5038,3472) 5060,3450 C2.24
NetU15_5: C2.8 U15.5 | length 1195.8
  TopLayer w12: U15.5 4740,3414 4854,3414 4871,3397 v1(4871,3268)
  BottomLayer w12: v1(4871,3268) 4871,3225 4855,3209 4855,3084 4924,3015 4924,2966 5049,2841 5049,2655 5054,2650 C2.8
NetU15_10: U15.10 U19.10 U20.2 | length 2572.3
  TopLayer w12: U19.10 3860,2425 3907,2425 v1(4004,2328) ; v1(4286,2207) 4695,2207 4740,2162 U20.2
  BottomLayer w12: v1(4004,2328) 3985,2328 3979,2322 3979,2239 4011,2207 v1(4286,2207) ; U15.10 4440,3388 4519,3388 4541,3366 4541,2994 4574,2961 4574,2333 4700,2207 4735,2207 4740,2202 U20.2
NetU15_11: U15.11 U16.10 U19.12 | length 4767.5
  TopLayer w12: U16.10 1830,2050 1437,2050 1370,2117 1370,2199 1396,2225 2392,2225 2411,2206 3601,2206 3652,2257 3803,2257 3804,2256 ; U19.12 3804,2256.67 3804,2256 ; v1(4086,2257) 4085,2256 3860,2256 3804,2256
  BottomLayer w12: v1(4086,2257) 4135,2306 4199,2306 4234,2341 4234,2721 4231,2724 4231,2937 4260,2966 4260,3222 4319,3281 4440,3281 U15.11
NetU15_13: C2.4 U15.13 | length 1996.5
  BottomLayer w12: U15.13 4440,3105 4484,3105 4490,3099 4490,2904 4549,2845 4549,2218 4661,2106 4780,2106 4790,2116 4790,2177 4851,2238 5003,2238 5040,2275 5040,2411 5079,2450 C2.4
NetU16_2: U16.2 U29.13 | length 240
  BottomLayer w12: U29.13 2180,2620 U16.2
NetU16_3: U16.3 U29.5 | length 411.1
  TopLayer w12: U29.5 1931,2449 2031,2449 U16.3
NetU16_4: U16.4 U29.9 U29.58 | length 1414
  BottomLayer w12: U29.58 1510,3170 1510,2551 1593,2468 1960,2468 ; U29.9 1960,2468 ; U16.4 1946,2434 1960,2448 1960,2468
NetU16_6: U16.6 U18.3 | length 2278.4
  TopLayer w12: U16.6 1830,2350 2407,2350 2463,2406 3332,2406 3433,2507 3612,2507 3691,2428 3691,2349 3639,2297 3585,2297 3580,2292 U18.3
NetU16_9: U16.9 U29.29 | length 1927.9
  TopLayer w12: v1(1866,3220) U29.29
  BottomLayer w12: U16.9 2030,2350 2030,2580 2010,2600 2010,2640 1980,2670 1816,2670 1810,2676 1810,3141 1866,3197 v1(1866,3220)
NetU17_2: U17.2 U20.8 | length 2664.8
  TopLayer w12: v1(2866,2907) 2883,2924 4418,2924 v1(4440,2902)
  BottomLayer w12: v1(2866,2907) 2866,2251 2935,2182 2935,2181.67 2960,2156.67 U17.2 ; U20.8 v1(4440,2902)
NetU17_6: U17.6 U29.63 | length 1774.5
  TopLayer w12: U29.63 1779,2801 1860,2801 1910,2751 1910,2681 1921,2670 2491,2670 2520,2699 2520,2734 2531,2745 2757,2745 2913,2589 3000,2589 U17.6
NetU17_9: U17.9 U29.20 | length 768.6
  TopLayer w12: v1(2565,2700) 2575,2700 2700,2575 U17.9
  BottomLayer w12: U29.20 2460,2852 2450,2852 2410,2892 2410,2964 2416,2970 2506,2970 2565,2911 v1(2565,2700)
NetU20_10: C2.15 U20.10 | length 1394.6
  TopLayer w12: v1(4504,2814) 4504,2795 4510,2789 4917,2789 4961,2833 4961,3021 4990,3050 C2.15
  BottomLayer w12: U20.10 4440,2470 4504,2534 v1(4504,2814)
NetU20_13: C2.11 U20.13 | length 1508.4
  TopLayer w12: U20.13 4440,2112 4446,2106 4799,2106 4888,2195 4888,2236 4950,2298 v1(4993,2298) ; v1(4994,2801) 5043,2850 C2.11
  BottomLayer w12: v1(4993,2298) 4993,2800 v1(4994,2801)
NetU21_1: U21.1 U22.1 U23.1 U24.1 U25.1 U26.1 U27.1 U28.57 | length 3867.1
  TopLayer w12: U23.1 1261,4480 1269,4488 1341,4488 1363,4510 1505,4510 1510,4515 1510,4610 U28.57
  BottomLayer w12: U27.1 1220,2497 1170,2547 1170,2729 1220,2779 U26.1 1220,2995 1170,3045 1170,3180 1220,3230 U25.1 1220,3543 1170,3593 1170,3775 1220,3825 U24.1 1220,4068 1171,4117 1171,4281 1220,4330 U23.1 1220,4570 1170,4620 1170,4805 1220,4855 U22.1 1220,5118 1171,5167 1171,5481 U21.1
NetU21_2: U21.2 U22.2 U23.2 U24.2 U25.2 U26.2 U27.2 U28.58 | length 3924
  TopLayer w12: U23.2 1200,4560 U28.58
  BottomLayer w12: U27.2 1096,2404 1096,2486 1071,2511 1071,2730 1120,2779 U26.2 1120,3012 1071,3061 1071,3187 1120,3236 U25.2 1120,3493 1071,3542 1071,3732 1095,3756 1095,3930 ; U24.2 1095,3930 ; U23.2 1120,4544 1095,4569 ; U22.2 1120,5069 ; U21.2 1071,5481 1071,5118 1120,5069 ; 1095,3930 1095,3955 1095,4043 1071,4067 1071,4257 1095,4281 1095,4480 1095,4569 ; 1095,4569 1071,4593 1071,4819 1094,4842 1094,5005 1094,5043 1120,5069
NetU21_3: U21.3 U22.3 U23.3 U24.3 U25.3 U26.3 U27.3 U28.60 | length 3875
  TopLayer w12: U22.3 1069,4956 1069,4529 U23.3 1080,4420 1293,4420 1333,4460 U28.60
  BottomLayer w12: U27.3 1020,2507 971,2556 971,2745 1020,2794 U26.3 1020,3032 971,3081 971,3202 1020,3251 U25.3 1020,3557 971,3606 971,3780 1020,3829 U24.3 1020,4082 971,4131 971,4305 1020,4354 U23.3 ; U22.3 971,5054 971,5481 U21.3
NetU21_4: U21.4 U22.4 U23.4 U24.4 U25.4 U26.4 U27.4 U28.62 | length 4070.7
  TopLayer w12: U23.4 1040,4360 U28.62
  BottomLayer w12: U27.4 920,2440 871,2489 871,2730 920,2779 U26.4 920,2965 871,3014 871,3255 920,3304 U25.4 920,3548 870,3598 870,3774 894,3798 894,3955 894,3989 920,4015 ; U24.4 920,4015 ; U23.4 876,4436 ; U21.4 871,5481 871,5054 U22.4 870,4955 870,4598 876,4592 876,4436 ; 876,4436 871,4431 871,4064 920,4015
NetU21_6: U21.6 U22.6 U23.6 U24.6 U25.6 U26.6 U27.6 U28.66 | length 4356.2
  TopLayer w12: U24.6 833,4068 1318,4068 1410,4160 U28.66
  BottomLayer w12: U27.6 720,2472 671,2521 671,2856 ; U26.6 671,2856 ; U25.6 720,3494 695,3519 ; U22.6 671,4956 ; U21.6 671,5481 671,4956 ; 671,2856 670,2857 670,3206 695,3231 695,3430 695,3519 ; 671,4956 671,4593 720,4544 U23.6 720,4354 670,4304 670,4065 720,4015 U24.6 720,3829 671,3780 671,3543 695,3519
NetU21_8: U21.8 U22.8 U23.8 U24.8 U25.8 U26.8 U27.8 | length 3396.9
  TopLayer w12: U26.8 669,2654 669,3081 U25.8 ; U22.8 669,4754 669,5181 U21.8
  BottomLayer w12: U27.8 670,2130 670,2467 620,2517 U26.8 ; U25.8 620,3255 670,3305 670,3462 645,3487 645,3630 U24.8 620,3805 670,3855 670,4018 620,4068 U23.8 620,4330 670,4380 670,4519 645,4544 645,4680 U22.8
NetU21_9: U21.9 U22.9 U23.9 U24.9 U25.9 U26.9 U27.9 U29.52 | length 4578.2
  TopLayer w12: U26.9 670,2555 581,2555 570,2566 570,3169 580,3179 671,3179 U25.9 ; U24.9 812,3563 1417,3563 U29.52
  BottomLayer w12: U27.9 720,2205 770,2255 770,2458 720,2508 U26.9 ; U25.9 720,3255 769,3304 769,3543 720,3592 U24.9 720,3756 769,3805 769,3981 745,4005 745,4155 U23.9 720,4305 770,4355 770,4573 720,4623 U22.9 720,4830 769,4879 769,5099 720,5148 U21.9
NetU21_11: U21.11 U22.11 U23.11 U24.11 U25.11 U26.11 U27.11 U29.56 | length 4099
  TopLayer w12: U25.11 1043,3253 1344,3253 1411,3320 U29.56 ; U22.11 969,4754 969,5181 U21.11
  BottomLayer w12: U27.11 920,2185 970,2235 970,2419 945,2444 945,2580 U26.11 920,2730 970,2780 970,2944 945,2969 945,3130 945,3223 ; U25.11 920,3198 945,3223 ; U22.11 920,4673 946,4647 946,4543 970,4519 970,4380 920,4330 U23.11 945,4155 945,4019 970,3994 970,3855 920,3805 U24.11 945,3630 945,3494 970,3469 970,3248 945,3223
NetU21_12: U21.12 U22.12 U23.12 U24.12 U25.12 U26.12 U27.12 U29.60 | length 3964.9
  TopLayer w12: U25.12 1075,3075 1415,3075 U29.60
  BottomLayer w12: U27.12 1020,2196 1070,2246 1070,2419 1045,2444 1045,2580 U26.12 1020,2743 1070,2793 1070,2944 1045,2969 1045,3130 1045,3227 ; U25.12 1020,3202 1045,3227 ; U21.12 1045,5205 1045,5069 1069,5045 1069,4904 1020,4855 U22.12 1020,4569 1069,4520 1069,4354 1020,4305 U23.12 1045,4155 1045,4019 1070,3994 1070,3830 1020,3780 U24.12 1045,3630 1045,3494 1070,3469 1070,3252 1045,3227
NetU21_13: U21.13 U22.13 U23.13 U24.13 U25.13 U26.13 U27.13 U29.62 | length 3977.1
  TopLayer w12: U25.13 1170,3180 1312,3180 1322,3170 1498,3170 1510,3158 1510,3100 1460,3050 U29.62
  BottomLayer w12: U27.13 1120,2205 1170,2255 1170,2492 1120,2542 U26.13 1120,2730 1170,2780 1170,2998 1120,3048 U25.13 1120,3170 1170,3220 1170,3494 1120,3544 U24.13 1120,3780 1170,3830 1170,4019 1145,4044 1145,4155 U23.13 1120,4305 1170,4355 1170,4573 1120,4623 U22.13 1120,4830 1170,4880 1170,5069 1120,5119 U21.13
NetU28_9: U28.9 U29.43 | length 340
  BottomLayer w12: U29.43 U28.9
NetU28_11: U28.11 U29.35 | length 464.3
  BottomLayer w12: U28.11 2211,3809 2211,3769 U29.35
NetU28_15: U28.15 U29.28 | length 864.3
  BottomLayer w12: U28.15 2260,3845 2434,3671 2434,3635 2510,3559 2510,3270 U29.28
NetU28_16: U28.16 U28.59 | length 962.2
  TopLayer w12: U28.59 1946,4174 2240,4174 2260,4154 U28.16
NetU28_17: U28.17 U29.6 | length 1723.4
  TopLayer w12: v1(1909,3910) 2310,3910 U28.17
  BottomLayer w12: U29.6 1760,3422 1810,3472 1810,3811 v1(1909,3910)
NetU28_18: U28.18 U29.2 | length 2319.3
  TopLayer w12: v1(1610,3790) 1510,3890 1510,4004 1516,4010 2410,4010 U28.18
  BottomLayer w12: U29.2 1610,2770 v1(1610,3790)
NetU28_20: U28.20 U28.54 | length 1274.9
  TopLayer w12: U28.54 1460,4715 1465,4710 1657,4710 2157,4210 2410,4210 U28.20
NetU28_27: U28.27 U29.4 | length 3439
  TopLayer w12: U29.4 1660,2818 1608,2870 1516,2870 1510,2876 1510,3040 1539,3069 1609,3069 1755,2923 v1(2231,2923) ; v1(2111,4543) 2277,4543 U28.27
  BottomLayer w12: v1(2111,4543) 2111,4021 2122,4010 2206,4010 2210,4006 2210,3857 2409,3658 2409,2999 2380,2970 2278,2970 v1(2231,2923)
NetU29_16: U29.16 U29.45 | length 1274.4
  BottomLayer w12: U29.45 1911,3569 1911,2932 2010,2833 2010,2683 2022,2671 2211,2671 U29.16
NetU29_22: U29.22 U29.61 | length 982.8
  TopLayer w12: U29.61 1586,3094 1672,3094 1796,2970 2410,2970 U29.22
VCC: C1.3 C3.2 C4.2 C5.1 C6.1 C7.1 C8.1 C9.1 C10.1 U1.7 U2.7 U3.7 U4.7 U5.7 U7.7 U8.7 U9.7 U10.7 U14.7 U15.7 U16.7 U17.7 U18.7 U19.7 U20.7 U21.7 U22.7 U23.7 U24.7 U25.7 U26.7 U27.7 U28.34 U29.34 | length 21967.3
  TopLayer w25: U27.7 677,2323 1383,2323 C4.2 1640,2360 U16.7 ; U24.7 854,3721 1527,3721 1559,3689 1661,3689 1693,3721 2575,3721 2643.5,3652.5 ; U21.7 690,5460 C3.2 1660,5460 U1.7 ; U29.34 2550,3610 2601,3610 2643.5,3652.5 ; U28.34 2485,4835 2659,4835 2665,4841 2837,4841 2860,4818 2882,4818 C5.1 ; C7.1 2858,3713 2704,3713 2643.5,3652.5 ; U17.7 3000,2688 3026,2714 3462,2714 3503,2673 3580,2673 U18.7@3596.33,2673 ; U7.7 3174,4570 3230,4626 3524,4626 U8.7 3713,4703 3955,4703 4012,4760 C6.1 ; U18.7 U18.7@3596.33,2673 ; U19.7 4160,2704 4151,2713 ; U14.7 4160,3641 4388,3641 4417,3670 4734,3670 4740,3664 U15.7 ; U9.7 4216,4626 4684,4626 U10.7 ; U20.7 4740,2694 4721,2713 4151,2713 ; v1(4967,4225) 4992,4250 C1.3 ; U18.7@3596.33,2673 3597.33,2674 3773,2674 3812,2713 3883,2713 3927,2669 4106,2669 4150,2713 4151,2713
  BottomLayer w25: U27.7 562,2438 562,2847 U26.7 563,2962 563,3373 594.5,3404.5 ; U25.7 594.5,3404.5 ; U24.7 567,3955 ; U23.7 563,4423 ; U21.7 564,5474 564,5061 U22.7 563,4948 563,4423 ; U17.7 3000,2770 C9.1 2991,2881 3034,2881 3093,2940 3093,3218 3112,3237 3112,3301 3095,3318 3095,3776 3076,3795 C7.1 2940,4510 U7.7 3000,4700 C5.1 2940,5475 2966,5501 3000,5501 U2.7 ; U8.7 3580,4825 3504,4901 3504,5449 3548,5493 3580,5493 U3.7 ; C8.1 4100,3675 ; U19.7 4160,2770 C10.1 4078,2852 4078,3621 4100,3643 4100,3675 ; U14.7 4143,3613.33 4143,3632 4100,3675 ; U9.7 4160,4700 C6.1 4100,5477 4125,5502 4160,5502 U4.7 ; U5.7 4740,5536 4675,5536 4639,5500 4639,5392 4659,5372 4659,4651 U10.7 4913,4397 4913,4279 v1(4967,4225) ; 563,4423 562,4422 562,3960 567,3955 ; 567,3955 563,3951 563,3436 594.5,3404.5
pads on no net: C1.4 C1.7 C1.8 C1.10 C1.13 C1.14 C1.16 C1.18 C1.19 C1.20 C1.24 C1.26 C2.2 C2.5 C2.6 C2.10 C2.12 C2.14 C2.16 C2.18 C2.20 C2.21 C2.22 C2.26 U1.1 U1.8 U1.9 U1.12 U2.3 U2.8 U3.1 U3.4 U3.8 U3.11 U4.1 U4.5 U4.11 U4.12 U5.1 U5.2 U5.8 U5.10 U5.11 U7.1 U7.3 U7.4 U7.5 U7.6 U8.2 U8.11 U8.12 U8.13 U9.1 U9.2 U9.3 U9.4 U9.8 U9.12 U9.14 U10.3 U10.8 U10.12 U12.4 U12.5 U12.7 U12.11 U13.1 U13.7 U13.8 U13.9 U13.10 U14.8 U14.11 U14.12 U15.1 U15.6 U15.8 U16.5 U16.8 U17.1 U17.3 U17.5 U17.8 U17.11 U18.1 U18.4 U18.5 U18.8 U18.10 U18.11 U18.12 U19.2 U19.3 U19.6 U19.8 U19.13 U20.12 U28.1 U28.2 U28.3 U28.4 U28.5 U28.6 U28.7 U28.8 U28.10 U28.13 U28.14 U28.19 U28.21 U28.23 U28.24 U28.25 U28.29 U28.30 U28.31 U28.33 U28.35 U28.36 U28.37 U28.38 U28.39 U28.40 U28.41 U28.42 U28.43 U28.45 U28.48 U28.52 U28.53 U28.56 U28.67 U29.1 U29.3 U29.7 U29.8 U29.10 U29.11 U29.14 U29.15 U29.17 U29.18 U29.19 U29.21 U29.23 U29.24 U29.26 U29.27 U29.30 U29.31 U29.32 U29.36 U29.37 U29.38 U29.39 U29.40 U29.41 U29.44 U29.46 U29.47 U29.48 U29.49 U29.50 U29.53 U29.55 U29.64 U29.65 U29.66 U29.67 U29.68

## Keep-outs
KeepOutLayer:
  the board outline again, w35